# Altium PCB 606-100872-r02.pcbdoc (part 2 of 2)
Units mm, origin at the board's own origin, x right, y up, seen from the top; angles counter-clockwise.
Board outline 50 x 10 mm, 2 copper layers (Top Layer, Bottom Layer), stack 1.471 mm thick; 12 components, 5 nets, 23 pads, 10 vias.
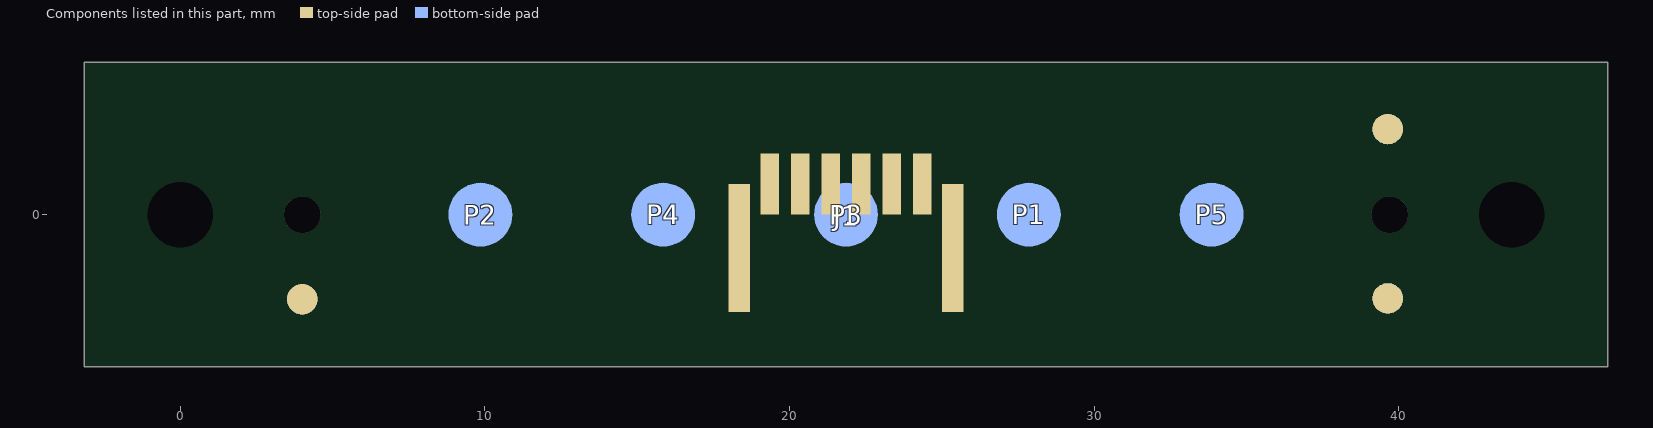
[diagram p2: the components of this part, seen from the top]

## Silkscreen, mask and mechanical layers (free items; w line width, h text height) (continued)
Drill Drawing:
  circle w0.254: c120.787,-4.817 r0.847
  lines w0.254: 119.94,-9.05 120.363,-9.05 120.787,-9.473 121.21,-9.05 121.633,-9.05 121.21,-8.627 121.633,-8.203 121.21,-8.203 120.787,-7.78 120.363,-8.203 119.94,-8.203 120.363,-8.627 119.94,-9.05 ; 119.94,-1.853 121.633,-1.853 121.633,-0.16 119.94,-0.16 119.94,-1.853
  lines w0.381: 118.421,-10.616 324.715,-10.616 ; 118.421,0.814 324.715,0.814 ; 132.414,-14.426 132.414,4.624 ; 145.872,-14.426 145.872,4.624 ; 173.55,-14.426 173.55,4.624 ; 186.399,-14.426 186.399,4.624 ; 205.038,-14.426 205.038,4.624 ; 243.127,-14.426 243.127,4.624 ; 258.109,-14.426 258.109,4.624 ; 277.052,-14.426 277.052,4.624 ; 296.097,-14.426 296.097,4.624 ; 118.421,-14.426 324.715,-14.426 324.715,4.624 118.421,4.624 118.421,-14.426
  text "Symbol" at 120.707,1.957 h1.83
  text "Count" at 133.557,1.957 h1.83
  text "Hole Size" at 147.015,1.957 h1.83
  text "Plated" at 174.693,1.957 h1.83
  text "Hole Type" at 187.542,1.957 h1.83
  text "Drill Layer Pair" at 206.181,1.957 h1.83
  text "Via/Pad" at 244.27,1.957 h1.83
  text "Pad Shape" at 259.252,1.957 h1.83
  text "Template" at 278.195,1.957 h1.83
  text "Hole Tolerance" at 297.24,1.957 h1.83
  text "10" at 133.557,-1.853 h1.52
  text "0.250mm (9.84mil)" at 147.015,-1.853 h1.52
  text "PTH" at 174.693,-1.853 h1.52
  text "Round" at 187.542,-1.853 h1.52
  text "Top Layer - Bottom Layer" at 206.181,-1.853 h1.52
  text "Via" at 244.27,-1.853 h1.52
  text "Rounded" at 259.252,-1.853 h1.52
  text "v50h25m0mx0" at 278.195,-1.853 h1.52
  text "2" at 133.557,-5.663 h1.52
  text "1.200mm (47.24mil)" at 147.015,-5.663 h1.52
  text "NPTH" at 174.693,-5.663 h1.52
  text "Round" at 187.542,-5.663 h1.52
  text "Top Layer - Bottom Layer" at 206.181,-5.663 h1.52
  text "Pad" at 244.27,-5.663 h1.52
  text "Rounded" at 259.252,-5.663 h1.52
  text "c120hn120" at 278.195,-5.663 h1.52
  text "2" at 133.557,-9.473 h1.52
  text "2.150mm (84.65mil)" at 147.015,-9.473 h1.52
  text "NPTH" at 174.693,-9.473 h1.52
  text "Round" at 187.542,-9.473 h1.52
  text "Top Layer - Bottom Layer" at 206.181,-9.473 h1.52
  text "Pad" at 244.27,-9.473 h1.52
  text "Rounded" at 259.252,-9.473 h1.52
  text "c200hn215" at 278.195,-9.473 h1.52
  text "14 Total" at 133.557,-13.283 h1.52
  text ".Layer_Name" at 18.35,-18.3 h3.81
DXF_TOP (Mech19):
  lines w0.013: 35.401,-7.367 35.401,-3.767 38.081,-3.767 38.081,-7.367 35.401,-7.367 ; 39.426,-3.767 40.036,-3.767 40.036,-1.767 39.426,-1.767 39.426,-3.767 ; 39.587,-1.963 cw(c39.685,-1.965) 39.689,-1.867 39.742,-1.88 39.773,-1.91 39.754,-1.922 39.721,-1.896 39.688,-1.89 ccw(c39.683,-1.963) 39.609,-1.961 ccw(c39.684,-1.959) 39.688,-2.034 39.729,-2.024 39.754,-2.002 39.773,-2.014 cw(c39.692,-1.959) 39.687,-2.056 cw(c39.682,-1.962) 39.587,-1.963 ; 40.426,-3.767 41.036,-3.767 41.036,-1.767 40.426,-1.767 40.426,-3.767 ; 40.561,-1.871 40.585,-1.871 40.64,-2.002 40.699,-1.871 40.703,-1.871 40.762,-2.002 40.817,-1.871 40.84,-1.871 40.764,-2.053 40.759,-2.053 40.701,-1.922 40.641,-2.053 40.637,-2.053 40.561,-1.871 ; 41.426,-3.767 42.036,-3.767 42.036,-1.767 41.426,-1.767 41.426,-3.767 ; 41.619,-1.871 41.643,-1.871 41.704,-2.004 41.765,-1.871 41.789,-1.871 41.705,-2.053 41.702,-2.053 41.619,-1.871 ; 42.426,-3.767 42.426,-1.767 43.036,-1.767 43.036,-3.767 42.426,-3.767 ; 42.593,-1.958 42.605,-2.021 42.635,-2.049 42.675,-2.057 ccw(c42.678,-1.976) 42.757,-1.96 42.757,-1.871 42.734,-1.871 42.734,-1.955 42.734,-1.975 42.731,-2 cw(c42.68,-1.979) 42.675,-2.034 cw(c42.671,-1.98) 42.619,-1.998 42.616,-1.979 42.616,-1.955 42.616,-1.871 42.593,-1.871 42.593,-1.958 ; 44.381,-7.367 44.381,-3.767 47.061,-3.767 47.061,-7.367 44.381,-7.367